# Altium PCB KlusterLab HMI r1.0.PcbDoc
Units mm, origin at the board's own origin, x right, y up, seen from the top; angles counter-clockwise.
Board outline 70 x 15 mm, 2 copper layers (Top Layer, Bottom Layer), stack 1.571 mm thick; 15 components, 14 nets, 46 pads, 190 vias.
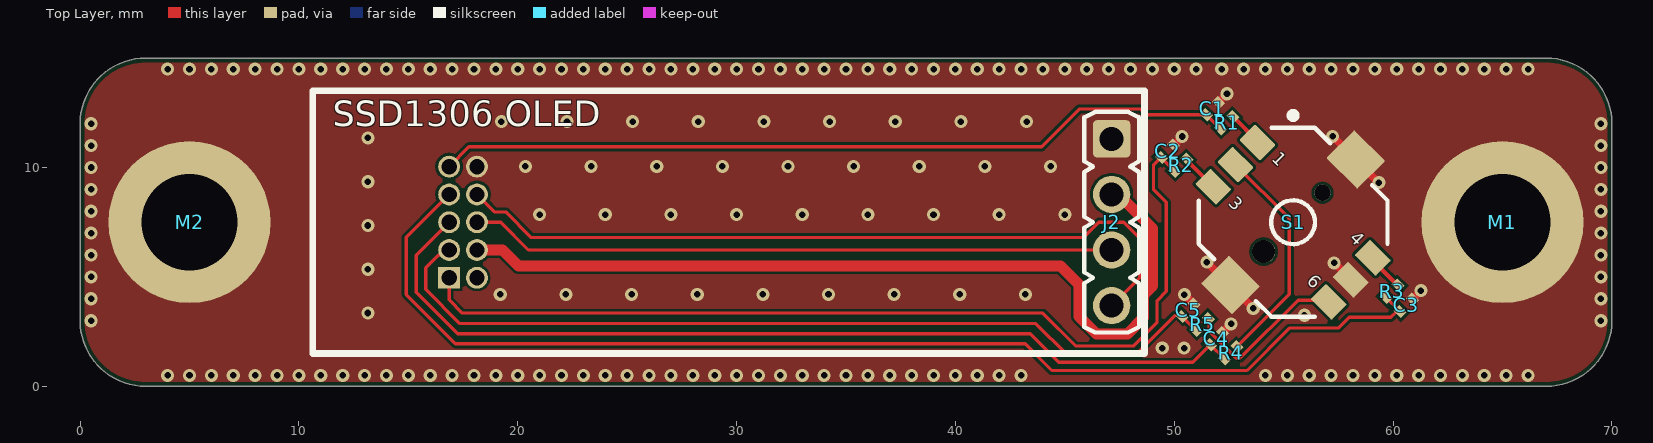
[diagram p0: Top Layer view]
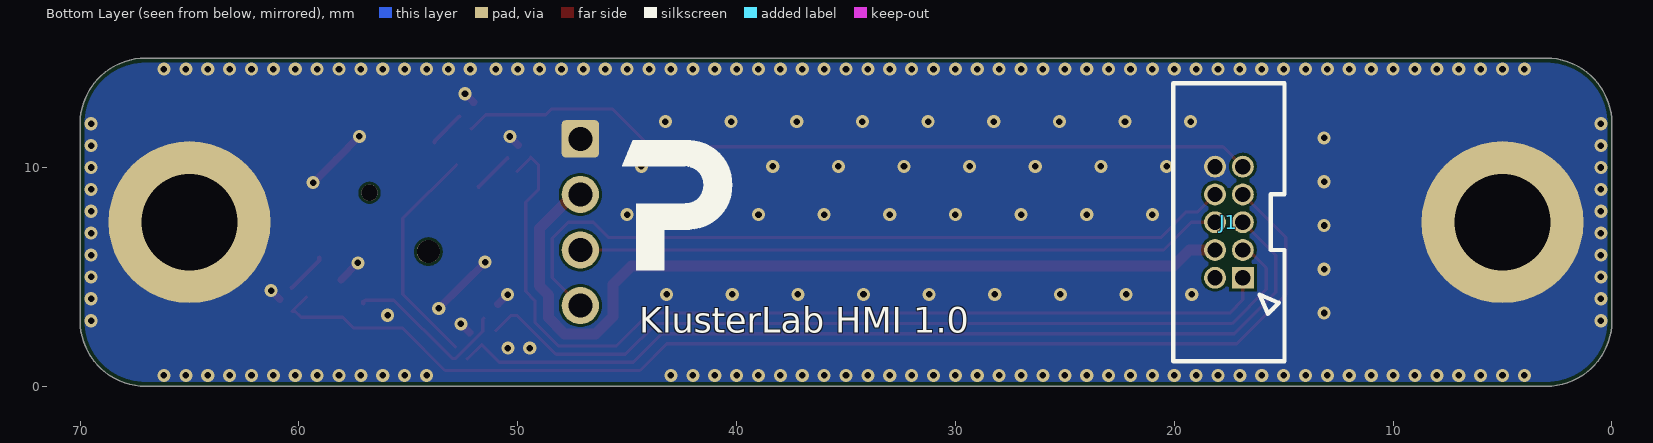
[diagram p1: Bottom Layer view, seen from below]
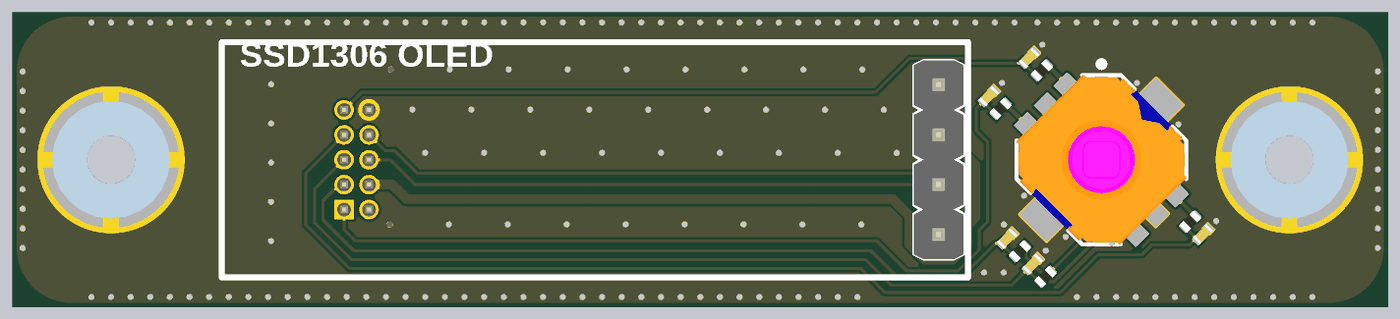
[diagram p2: 3D render of the assembled board from above, using the file's embedded part models]

## Layer stack, top to bottom
Top Solder: solder mask 0.0102, Solder Resist, Dk 3.5
Top Layer: signal copper 0.0356
Dielectric 1: dielectric 1.5, FR-4, Dk 4.8
Bottom Layer: signal copper 0.0356
Bottom Solder: solder mask 0.0102, Solder Resist, Dk 3.5

## Board outline
3,0 cw(c3,3) 0,3 0,12 cw(c3,12) 3,15 67,15 cw(c67,12) 70,12 70,3 cw(c67,3) 67,0

## Design rules (kind name [scope] priority, off if disabled: settings)
BoardOutlineClearance [All] p1: gap=0.2 ignorepadtopadclearanceinfootprint=FALSE
Clearance [All] p1: gap=0.125 ignorepadtopadclearanceinfootprint=FALSE
ComponentClearance ComponentClearance_OLED [IsFree and OnLayer('Top 3D Body') vs InComponent('J2')] p1: gap=0 collisioncheckmode=3 verticalgap=0 showdistances=FALSE
ComponentClearance [All] p2: gap=0.2 collisioncheckmode=3 verticalgap=0.2 showdistances=FALSE
HoleSize [All] p1: absolutevalues=TRUE maxlimit=6.3 minlimit=0.2 maxpercent=80.000 minpercent=20.000
PolygonConnect [All] p1: connectstyle=Direct reliefconductorwidth=0.254 reliefentries=4 polygonreliefangle="90 Angle" airgapwidth=0.254
RoutingVias [All] p1: holewidth=0.3 width=0.6 viastyle="Through Hole" minholewidth=0.3 minwidth=0.6 maxholewidth=0.3 maxwidth=0.6
SolderMaskExpansion [All] p1: expansion=0.05 istentingtop=FALSE
Width [All] p1: maxlimit=5 minlimit=0.127 preferedwidth=0.15
28 further rules are at their usual default settings.

## Components (designator, comment, footprint, x,y, rotation, side; value= is the part's Value field where it differs from the comment)
C1 "100nF 50V" CAP_0402_L 51.742,12.692 r45 top
C2 "100nF 50V" CAP_0402_L 49.693,10.742 r45 top
C3 "100nF 50V" CAP_0402_L 60.6,3.7 r45 top
C4 "100nF 50V" CAP_0402_L 51.929,2.179 r45 top
C5 "100nF 50V" CAP_0402_L 50.629,3.479 r45 top
J1 "Pinheader, 10 Pin, THT, Straight" 62701021621 17.5,7.5 r270 bottom
J2 "WE / WR-PHD / 61300411121 / PinHeader / 1x4 Pin / RM2.54 / Top Entry / Male" WE_61300411121 47.14,7.5 r270 top value=61300411121
M1 "9774050360R" 9774050360R 65,7.5 r0 top
M2 "9774050360R" 9774050360R 5,7.5 r0 top
R1 "1k 1%" RES_0402_L 52.4,12.05 r45 top
R2 "1k 1%" RES_0402_L 50.3,10.1 r45 top
R3 "1k 1%" RES_0402_L 59.95,4.35 r45 top
R4 "1k 1%" RES_0402_L 52.581,1.537 r45 top
R5 "1k 1%" RES_0402_L 51.279,2.829 r45 top
S1 "AlpsAlpine SKRHACE010" AlpsAlpine_SKRHACE010 55.43,7.5 r315 top locked

## Footprints (in the part's own frame and the unit in brackets; to place one, negate y for a bottom-side part, rotate by r counter-clockwise, add the part's x,y. Pads: shape width x height; smd on the part's side, far side on the other; paste and mask are expansions set on the pad)
9774050360R [mm] "Würth 9774050360R M3, H: 5mm"
  round 7.4 hole 4.4: 1(0,0)
  body extent -3,-3 3,3, height 5
62701021621 [mm] "Pin header 1.27mm 10pol Straight"
  rect 1x1 hole 0.7: 1(2.54,0.635)
  round 1 hole 0.7: 2(2.54,-0.635) 3(1.27,0.635) 4(1.27,-0.635) 5(0,0.635) 6(0,-0.635) 7(-1.27,0.635) 8(-1.27,-0.635) 9(-2.54,0.635) 10(-2.54,-0.635)
  silkscreen extent -6.35,-2.54 6.35,2.54, body extent -6.35,-2.5 6.35,2.55, height 4.9
AlpsAlpine_SKRHACE010 [mm] "Multi-Directional Switches, 4-directions, center-push"
  rrect10% 1.35x1 smd: 1(-3.725,1.425) 2(-3.725,0) 3(-3.725,-1.425) 4(3.725,1.425) 5(3.725,0) 6(3.725,-1.425)
  rrect5% 2x1.8 smd: MP1(0,4.05) MP2(0,-4.05)
  round 0.75 hole 0.75 unplated mask+0.05: ""(0,1.9)
  round 1.05 hole 1.05 unplated mask+0.05: ""(0,-1.9)
  silkscreen extent -3.75,-3.75 3.75,3.75, body extent -3.74,-3.75 3.74,3.75, height 5
CAP_0402_L [mm] "Chip Capacitor, 2-Leads, Body 1,00x0,50mm, IPC High Density"
  rect 0.38x0.48 smd: 1(-0.395,0) 2(0.395,0)
  body extent -0.59,-0.26 0.59,0.26, height 0.51
RES_0402_L [mm] "Chip Resistor, 2-Leads, Body 1,00x0,53mm, IPC High Density"
  rect 0.38x0.48 smd: 1(-0.395,0) 2(0.395,0)
  body extent -0.52,-0.27 0.52,0.27, height 0.4
WE_61300411121 [mm] "Wuerth Elektronik WR-PHD 2.54mm 4-Pin THT Header"
  rrect20% 1.7x1.7 hole 1.1: 1(-3.81,0)
  round 1.7 hole 1.1: 2(-1.27,0) 3(1.27,0) 4(3.81,0)
  silkscreen extent -5.04,-1.25 5.04,1.25, body extent -5.08,-1.27 5.08,1.27, height 8.54

## Part data
C1 C2 C3 C4 C5: library part CAP_0402_100nF_50V, "Multilayer Ceramic Capacitors MLCC - SMD/SMT 0402 50VDC", Manufacturer 1="Murata Electronics", Manufacturer 1 Prt. Nr.=GCM155L8EH104KE07D, Manufacturer 2=TDK, Manufacturer 2 Prt. Nr.=UMK105B7104KV-FR
J1: library part "62701021621_Box Pin header THT 1.27mm 10Pol Straight", "Box Pin header THT 1.27mm 10Pol Straight", Manufacturer 1="Würth Elektronik", Manufacturer 1 Prt. Nr.=62701021621
J2: library part CMP-CON-000024-2, "WR-PHD Pin Header", Manufacturer #1="Wuerth Elektronik", Max Operating Temperature=105°C, Min Operating Temperature=-40°C, Entry Direction="Top Entry", Gender=Male, Mount="Surface Mount", Order Code #1=61300411121, Pin Count=4, Symbol Text=61300411121
M1 M2: library part "Würth Standoff M3 h:5mm", "Würth Standoff M3 h:5mm 9774050360R", Manufacturer 1="Würth Elektronik", Manufacturer 1 Prt. Nr.=9774050360R
R1 R2 R3 R4 R5: library part RES_0402_1k_1%, "Thick Film Resistors - SMD 1kOhm 1%", Manufacturer 1="Vishay / Dale", Manufacturer 1 Prt. Nr.=CRCW04021K00FKEDC, Manufacturer 2=Yageo, Manufacturer 2 Prt. Nr.=RC0402FR-7W1KL
S1: library part "AlpsAlpine_ SKRHACE010_Multi-Directional-Switches_4-directions_center-push", "Multi-Directional Switches, 4-directions, center-push", Manufacturer 1="Alps Alpine", Manufacturer 1 Prt. Nr.=SKRHACE010

## Via types
v1: diameter 0.6, hole 0.3, Top Layer to Bottom Layer, tented both sides, 190 vias

## Nets (pads, with @x,y where several pads share a name; then routed paths per layer and width w, separated by ;. In a path a pad name is that pad's centre, name@x,y a point inside that pad or via, vN(x,y) a via of type N, cw(c..) or ccw(c..) an arc to the next point about the centre after c; other vN are vias at no path point)
Button_C: C4.1 J1.5 R4.1 | length 42.7
  Top Layer w0.15: J1.5 15.358,5.993 15.358,4.294 17.249,2.403 43.414,2.403 44.721,1.096 50.846,1.096 C4.1 51.655,1.9 52.297,1.258 R4.1 R4.1@52.302,1.251
Button_D: C5.1 J1.3 R5.1 | length 39.8
  Top Layer w0.15: J1.3 16.635,6.23 16.4,5.995 16.375,5.995 15.79,5.409 15.79,4.438 17.359,2.868 43.682,2.868 45.086,1.464 48.255,1.464 50.027,3.235 50.315,3.235 C5.1 R5.1
Button_L: C2.1 J1.1 R2.1 | length 43.7
  Top Layer w0.15: J1.1 16.865,3.952 17.467,3.35 44,3.35 45.511,1.839 48.133,1.839 49.213,2.919 49.213,3.913 49.638,4.338 49.638,8.412 49.05,9 49.05,10.099 C2.1 49.413,10.445 50.021,9.838 R2.1
Button_R: C3.1 J1.7 R3.1 | length 54.3
  Top Layer w0.15: J1.7 14.906,6.811 14.906,4.194 17.152,1.948 43.186,1.948 44.411,0.723 53.326,0.723 55.265,2.662 57.495,2.662 57.988,3.155 59.902,3.155 60.167,3.421 C3.1 R3.1
Button_U: C1.1 J1.9 R1.1 | length 36.7
  Top Layer w0.15: J1.9 17.769,10.944 43.944,10.944 45.675,12.675 48.452,12.675 48.714,12.412 C1.1 ; C1.1@51.471,12.412 52.112,11.771 R1.1
GND: C1.2 C2.2 C3.2 C4.2 C5.2 J1.10 J2.1 M1.1 M2.1 S1.5 S1.MP1 S1.MP2 | length 9.9
  Top Layer w0.35: C2.2@49.972,11.025 v1@50.362,11.415 ; v1(50.465,4.195) 50.469,4.195 C5.2@50.905,3.759 ; v1@51.493,5.674 52.548,4.618 v1@53.604,3.563 ; C1.2@52.021,12.974 v1@52.411,13.364 ; C4.2@52.209,2.462 v1@52.599,2.852 ; v1@57.238,11.419 S1.MP1 v1@59.349,9.308 ; v1@57.307,5.64 S1.5@58.072,4.874 ; C3.2@60.879,3.983 v1@61.269,4.373
  other v1: 4,0.5 5,0.5 6,0.5 7,0.5 8,0.5 9,0.5 10,0.5 11,0.5 12,0.5 13,0.5 14,0.5 15,0.5 16,0.5 17,0.5 18,0.5 19,0.5 20,0.5 21,0.5 22,0.5 23,0.5 24,0.5 25,0.5 26,0.5 27,0.5 28,0.5 29,0.5 30,0.5 31,0.5 32,0.5 33,0.5 34,0.5 35,0.5 36,0.5 37,0.5 38,0.5 39,0.5 40,0.5 41,0.5 42,0.5 43,0.5 54.168,0.5 55.168,0.5 56.168,0.5 57.168,0.5 58.168,0.5 59.168,0.5 60.168,0.5 61.168,0.5 62.168,0.5 63.168,0.5 64.168,0.5 65.168,0.5 66.168,0.5 49.45,1.75 50.45,1.75 52.599,2.856 0.5,3 69.5,3 55.95,3.25 13.15,3.35 53.607,3.563 0.5,4 69.5,4 19.2,4.2 22.2,4.2 25.2,4.2 28.2,4.2 31.2,4.2 34.2,4.2 37.2,4.2 40.2,4.2 43.2,4.2 61.269,4.376 0.5,5 69.5,5 13.15,5.35 57.303,5.64 51.489,5.674 0.5,6 69.5,6 0.5,7 69.5,7 13.15,7.35 21,7.85 24,7.85 27,7.85 30,7.85 33,7.85 36,7.85 39,7.85 42,7.85 45,7.85 0.5,8 69.5,8 0.5,9 69.5,9 59.353,9.308 13.15,9.35 0.5,10 69.5,10 20.35,10.05 23.35,10.05 26.35,10.05 29.35,10.05 32.35,10.05 35.35,10.05 38.35,10.05 41.35,10.05 44.35,10.05 0.5,11 69.5,11 13.15,11.35 50.362,11.418 57.235,11.419 0.5,12 69.5,12 19.25,12.1 22.25,12.1 25.25,12.1 28.25,12.1 31.25,12.1 34.25,12.1 37.25,12.1 40.25,12.1 43.25,12.1 52.411,13.368 4,14.5 5,14.5 6,14.5 7,14.5 8,14.5 9,14.5 10,14.5 11,14.5 12,14.5 13,14.5 14,14.5 15,14.5 16,14.5 17,14.5 18,14.5 19,14.5 20,14.5 21,14.5 22,14.5 23,14.5 24,14.5 25,14.5 26,14.5 27,14.5 28,14.5 29,14.5 30,14.5 31,14.5 32,14.5 33,14.5 34,14.5 35,14.5 36,14.5 37,14.5 38,14.5 39,14.5 40,14.5 41,14.5 42,14.5 43,14.5 44,14.5 45,14.5 46,14.5 47,14.5 48,14.5 49,14.5 50,14.5 51,14.5 52.168,14.5 53.168,14.5 54.168,14.5 55.168,14.5 56.168,14.5 57.168,14.5 58.168,14.5 59.168,14.5 60.168,14.5 61.168,14.5 62.168,14.5 63.168,14.5 64.168,14.5 65.168,14.5 66.168,14.5
I2C_OLED_SCL: J1.6 J2.3 | length 29.5
  Top Layer w0.15: J1.6 19.217,7.5 20.487,6.23 J2.3
I2C_OLED_SDA: J1.8 J2.4 | length 35.3
  Top Layer w0.15: J1.8 18.934,7.971 19.446,7.971 20.617,6.8 45.85,6.8 46.55,7.5 47.682,7.5 48.42,6.763 48.42,4.97 J2.4
NetR1_2: R1.2 S1.1 | length 1.7
  Top Layer w0.2: R1.2 53.804,11.205 S1.1
NetR2_2: R2.2 S1.3 | length 1.9
  Top Layer w0.2: R2.2@50.471,10.429 51.774,9.126 S1.3
NetR3_2: R3.2 S1.4 | length 1.9
  Top Layer w0.2: S1.4 59.072,5.749 R3.2@60.323,4.498
NetR4_2: R4.2 S1.2 | length 10.3
  Top Layer w0.15: S1.2 55.251,7.679 55.251,4.206 R4.2@52.85,1.805
NetR5_2: R5.2 S1.6 | length 7.8
  Top Layer w0.15: R5.2 51.594,3.073 51.594,2.521 52.841,1.274 53.003,1.274 55.662,3.932 56.983,3.932 S1.6
  Top Layer w0.2: S1.6@57.056,3.794 S1.6
VCC3V3: J1.4 J2.2 | length 40
  Top Layer w0.5: J1.4 19.31,6.23 20.042,5.498 44.802,5.498 45.65,4.65 45.65,3.2 46.45,2.4 47.859,2.4 48.602,3.143 48.602,4.178 49.007,4.583 49.007,7.216 47.453,8.77 J2.2
pads on no net: J1.2 S1.

## Polygon pours and split planes (outlines as drawn)
GND on Top Layer "Top-GND" (solid, remove dead copper, pour order 1): 3,0 cw(c3,3) 0,3 0,12 cw(c3,12) 3,15 67,15 cw(c67,12) 70,12 70,3 cw(c67,3) 67,0
GND on Bottom Layer "Bottom-GND" (solid, remove dead copper, pour order 0): 3,0 cw(c3,3) 0,3 0,12 cw(c3,12) 3,15 67,15 cw(c67,12) 70,12 70,3 cw(c67,3) 67,0

## Silkscreen, mask and mechanical layers (free items; w line width, h text height)
Top Overlay:
  lines w0.3: 10.64,1.5 48.64,1.5 48.64,13.5 10.64,13.5 10.64,1.5
  text "SSD1306 OLED" at 11.545,11.495 h2
Bottom Overlay:
  region: 2214 vertices and 0 holes, not listed, extent 40.204,5.315 45.234,11.245
  text "KlusterLab HMI 1.0" at 44.452,2.068 h2
Outline:
  the board outline again, w0.05

## Text inside footprints (layer, text, board x,y; h text height)
S1: Top Overlay "1" at 54.263,10.222 h1 r315; Top Overlay "6" at 55.863,4.609 h1 r315; Top Overlay "3" at 52.292,8.18 h1 r315; Top Overlay "4" at 57.834,6.581 h1 r315